# Altium PCB v1_long.PcbDoc (part 4 of 4)
Units mm, origin at the board's own origin, x right, y up, seen from the top; angles counter-clockwise.
Board outline 116.27 x 185.5 mm, 2 copper layers (Top Layer, Bottom Layer); 294 components, 195 nets, 982 pads, 413 vias.
Unrouted connection lines stored in the file: 3.
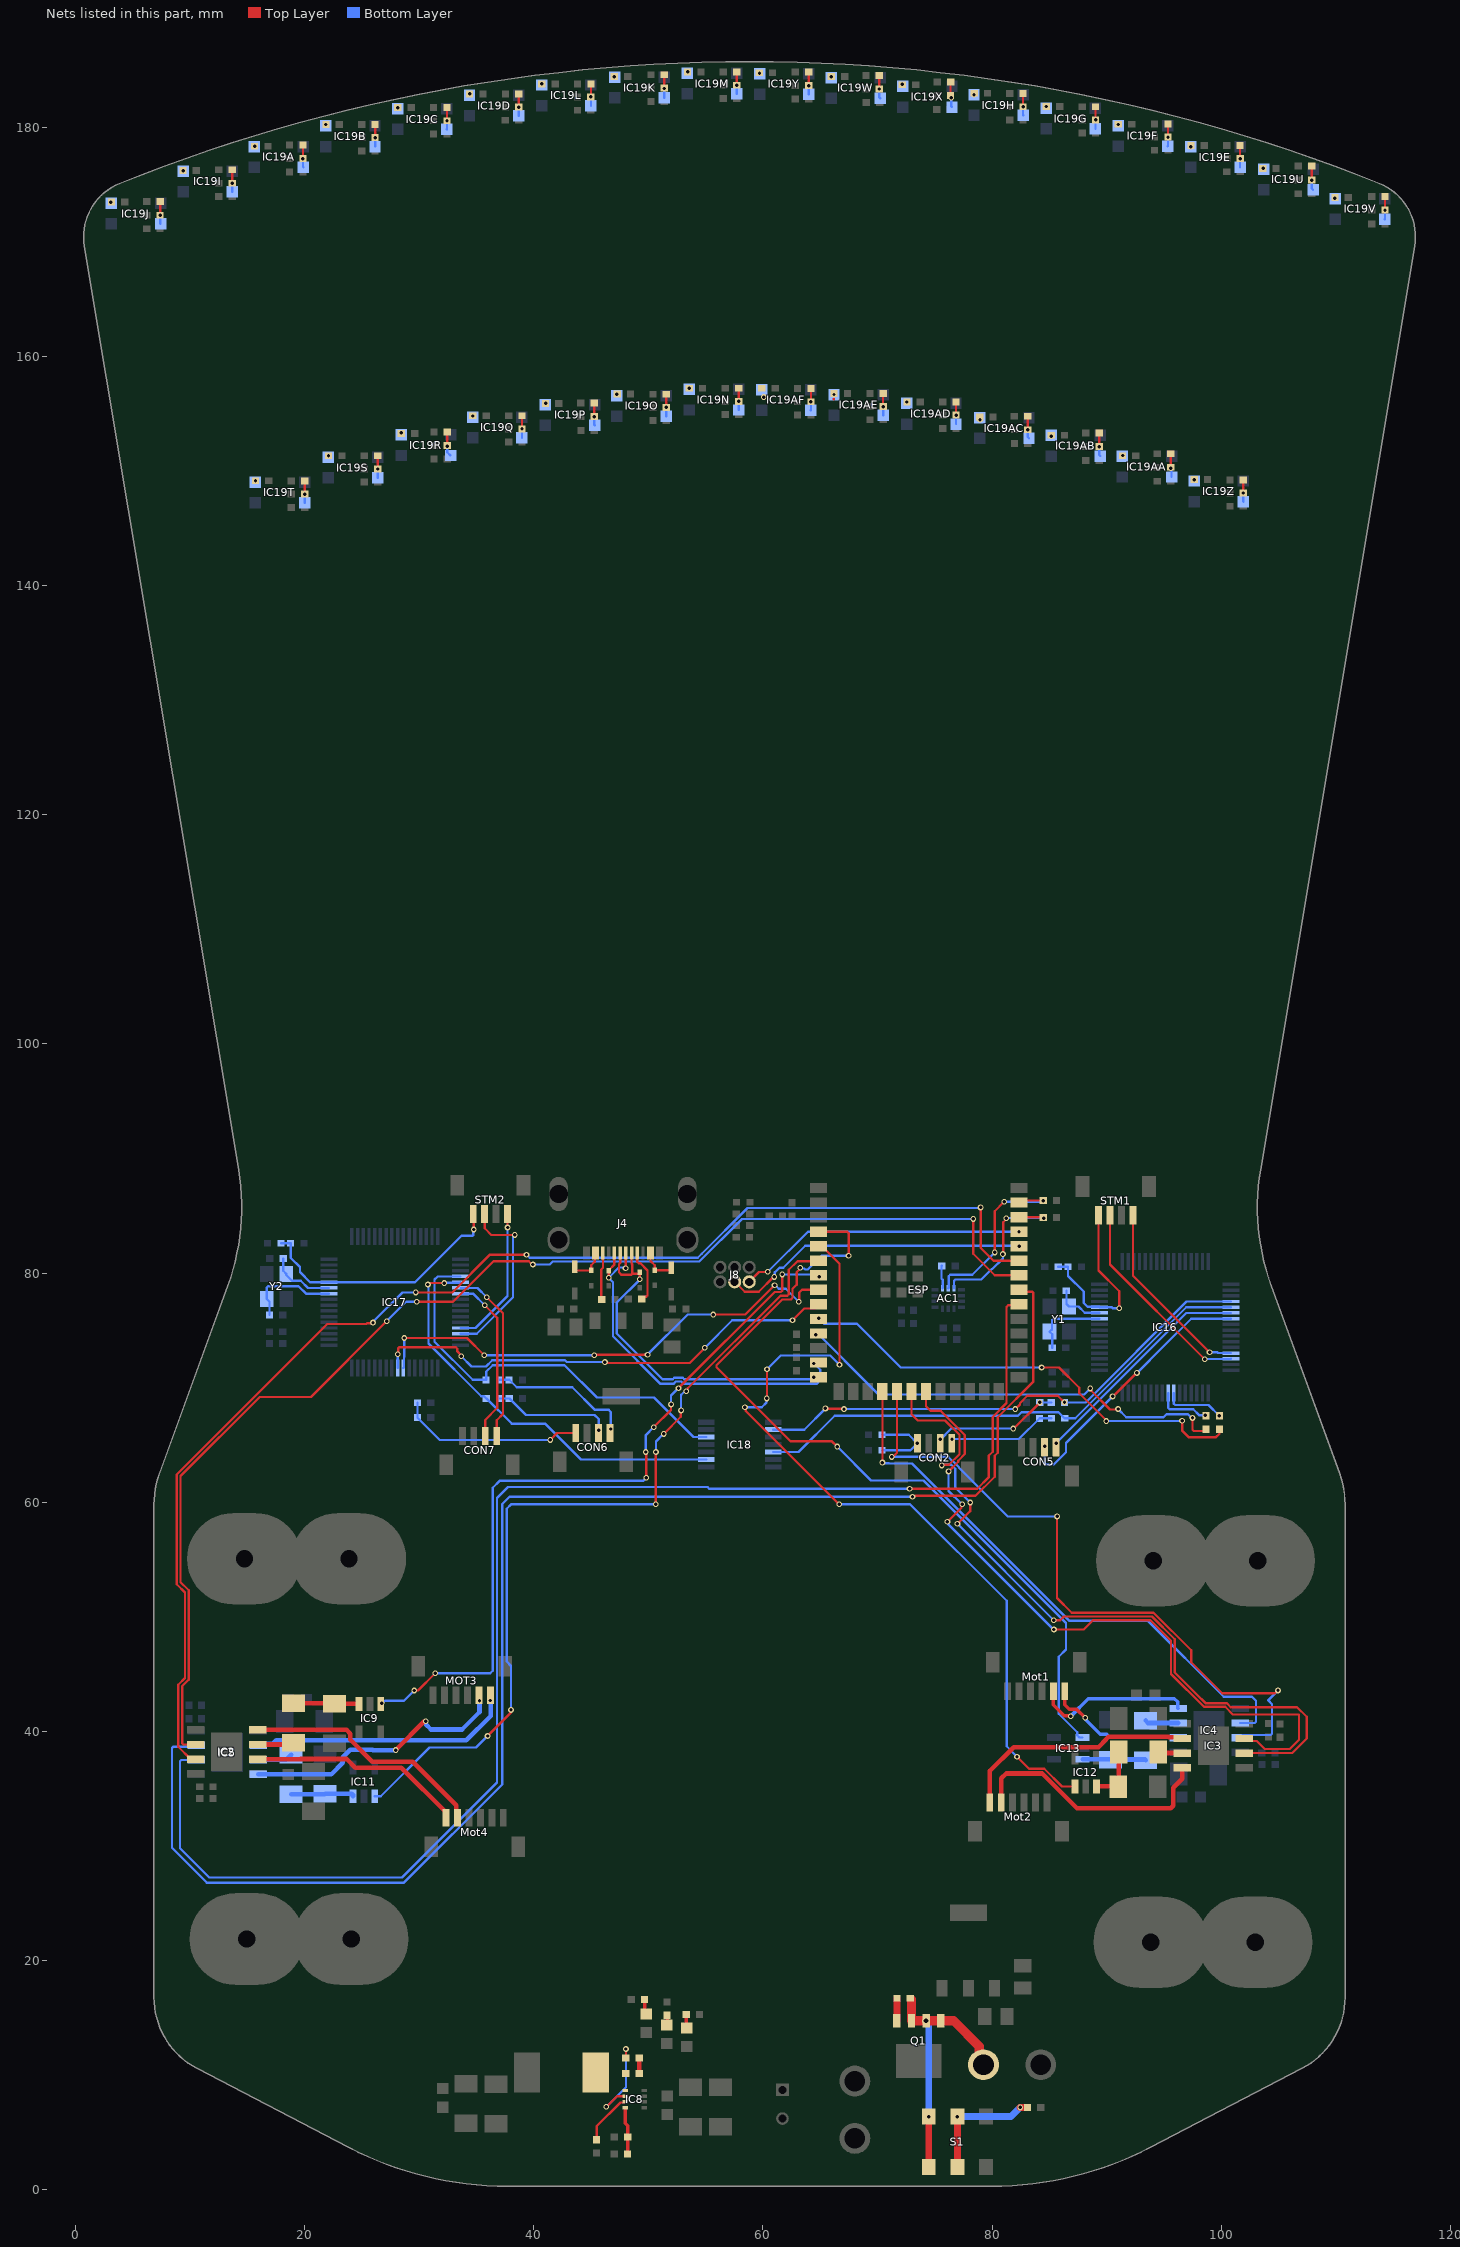
[diagram p4: the nets of this part, all layers, seen from the top]

## Via types
v1: diameter 0.5, hole 0.3, Top Layer to Bottom Layer, tented both sides, 349 vias
v2: diameter 0.4, hole 0.25, Top Layer to Bottom Layer, tented both sides, 63 vias
v3: diameter 0.7, hole 0.4, Top Layer to Bottom Layer, tented both sides, 1 vias

## Nets (pads, with @x,y where several pads share a name; then routed paths per layer and width w, separated by ;. In a path a pad name is that pad's centre, name@x,y a point inside that pad or via, vN(x,y) a via of type N, cw(c..) or ccw(c..) an arc to the next point about the centre after c; other vN are vias at no path point) (continued)
M_CURR_1: ESP.4 IC13.1 | length 72.6
  Top Layer w0.2: v1(63.25,80.455) 63.25,80.374 62.935,80.058 62.935,78.985 62.584,78.634 62.584,77.834 62.441,77.691 61.686,77.691 55.943,71.948 55.943,71.782 62.425,65.3 66.025,65.3 v1(66.475,64.85) ; ESP.4@64.85,83.61 67.358,83.61 67.475,83.493 v1(67.475,81.5)
  Bottom Layer w0.2: v1(63.25,80.455) 63.307,80.398 63.602,80.398 63.7,80.3 63.9,80.3 65.1,81.5 v1(67.475,81.5) ; v1(66.475,64.85) 69.433,61.892 74.008,61.892 86.459,49.441 86.459,47.137 85.825,46.504 85.825,41.525 87.438,39.912 87.438,39.65 87.638,39.45 IC13.1@87.9,39.45
M_CURR_2: ESP.5 IC12.1 | length 73.5
  Top Layer w0.2: v1(58.425,68.275) 58.482,68.218 58.482,67.982 v1(66.647,59.818) ; v1(60.325,69.05) 60.35,69.075 v1(60.35,71.6) ; ESP.5@64.85,82.34 65.15,82.34 66.679,80.811 v1(66.679,71.997) ; v1(82.175,37.775) 83.223,36.727 84.552,36.727 86.104,35.175 IC12.1@87.225,35.175
  Bottom Layer w0.2: v1(58.425,68.275) 59.9,68.275 60.31,68.685 60.31,69.035 v1(60.325,69.05) ; v1(60.35,71.6) 61.55,72.8 65.876,72.8 v1(66.679,71.997) ; v1(66.647,59.818) 72.84,59.818 81.277,51.381 81.277,38.673 v1(82.175,37.775)
M_CURR_3: ESP.6 IC11.1 | length 74.7
  Top Layer w0.2: v1(35.95,39.575) 38,41.625 v1(38,41.85) ; v1(50.625,59.8) 50.638,59.813 50.638,64.363 v1(50.65,64.375) ; v1(51.325,65.95) 52.825,67.45 52.825,67.975 v1(52.85,68) ; v1(53.303,69.679) 53.303,69.76 53.431,69.888 53.431,69.929 61.52,78.018 62.118,78.018 62.257,78.157 62.257,80.282 63.01,81.035 64.815,81.035 ESP.6@64.85,81.07
  Bottom Layer w0.2: IC11.1@26.1,34.325 26.625,34.325 30.875,38.575 34.95,38.575 v1(35.95,39.575) ; v1(38,41.85) 38,45.694 37.619,46.075 37.619,59.419 38,59.8 v1(50.625,59.8) ; v1(50.65,64.375) 50.65,65.3 51.3,65.95 v1(51.325,65.95) ; v1(52.85,68) 52.85,69.359 52.861,69.37 52.865,69.37 53.174,69.679 v1(53.303,69.679)
M_CURR_4: ESP.7 IC9.1 | length 67.1
  Top Layer w0.2: IC9.1@26.625,42.375 26.65,42.375 v1(26.725,42.45) ; v1(29.55,43.55) 29.875,43.55 v1(31.375,45.05) ; v1(49.775,64.375) 49.8,64.35 v1(49.8,62.125) ; v1(50.45,66.525) 51.975,68.05 v1(51.975,68.525) ; v1(52.625,69.95) 61.02,78.345 61.56,78.345 61.677,78.462 v1(61.677,79.875)
  Bottom Layer w0.2: v1(26.725,42.45) 26.792,42.45 26.992,42.65 28.65,42.65 v1(29.55,43.55) ; v1(31.375,45.05) 36.175,45.05 36.4,45.275 36.4,61.25 37,61.85 49.525,61.85 v1(49.8,62.125) ; v1(49.775,64.375) 49.775,65.85 v1(50.45,66.525) ; v1(51.975,68.525) 51.975,69.3 v1(52.625,69.95) ; v1(61.677,79.875) 64.711,79.875 v1(64.922,79.664)
NetAC1_12: AC1.12 R21.1 | length 2
  Bottom Layer w0.2: R21.1@75.616,80.625 75.591,80.6 75.591,79.509 75.7,79.4 75.7,78.7 AC1.12@75.675,78.675
NetC15_1: C15.1 R9.1 | length 1.3
  Top Layer w0.4: C15.1@49.184,10.125 R9.1@49.184,11.45
NetC15_2: C15.2 IC8.5 L1.1
NetC19_1: C19.1 IC8.7 | length 4.5
  Top Layer w0.2: C19.1@45.475,4.352 45.475,5.5 47.55,7.575 47.912,7.575 IC8.7@47.962,7.625
NetCON2_1: CON2.1 R32.1 R33.1 | length 9.8
  Top Layer w0.2: CON2.1@76.475,65.125 76.5,65.15 v1(76.5,65.5)
  Bottom Layer w0.2: v1(76.5,65.5) 82.332,65.5 84.157,67.325 R33.1@85.182,67.325
NetCON2_2: CON2.2 R30.1 R31.1 | length 11.4
  Top Layer w0.2: CON2.2@75.475,65.125 75.475,65.456 v1(75.49,65.47) ; v1(81.85,66.42) 81.895,66.42 v1(84.175,68.7)
  Bottom Layer w0.2: v1(75.49,65.47) 76.439,66.42 v1(81.85,66.42) ; v1(84.175,68.7) R31.1@85.157,68.7
NetCON2_4: CON2.4 R28.1 R29.1 | length 6.7
  Bottom Layer w0.2: R28.1@70.384,64.525 72.875,64.525 v1(73.475,65.125) 72.725,65.875 R29.1@70.384,65.875
NetCON6_1: CON6.1 R38.1 R39.1 | length 12.4
  Bottom Layer w0.2: R39.1@36.993,70.675 R38.1@37.825,70.675 37.842,70.675 38.492,70.025 43.35,70.025 45.325,68.05 46.525,68.05 46.703,67.872 v1(46.703,66.382)
NetCON6_2: CON6.2 R36.1 R37.1 | length 10.4
  Bottom Layer w0.2: R37.1@37.009,69.05 R36.1@37.841,69.05 37.858,69.05 39.308,67.6 45.3,67.6 45.65,67.25 v1(45.65,66.275)
NetCON6_4: CON6.4 R34.1 R35.1 | length 16.2
  Top Layer w0.2: v1(41.425,65.425) 42.025,66.025 CON6.4@43.65,66.025
  Bottom Layer w0.2: R34.1@29.832,68.675 29.832,67.375 R35.1@29.835,67.372 31.782,65.425 v1(41.425,65.425)
NetD1_2: D1.2 R12.2 | length 1.3
  Top Layer w0.3: R12.2@49.659,16.575 49.659,15.454 D1.2@49.8,15.313
NetD2_2: D2.2 R13.2 | length 1.2
  Top Layer w0.3: R13.2@53.291,15.275 53.291,14.122 D2.2@53.325,14.088
NetD3_2: D3.2 ESP.13 J4.A6 J4.B6 | length 33.1
  Top Layer w0.2: v1(46.525,79.595) D3.2@46.525,80.195 46.525,80.235 47.025,80.735 J4.B6@47.025,81.75 ; v1(48,80.418) 48.012,80.431 48.012,81.3 48.025,81.312 J4.A6@48.025,81.75 ; v1(64.45,72.1) 64.53,72.18 ESP.13@64.85,72.18
  Bottom Layer w0.2: v1(48,80.418) 47.943,80.475 47.495,80.475 47.45,80.52 v1(46.525,79.595) 46.525,79.577 46.905,79.197 46.905,74.47 51.055,70.32 52.175,70.32 52.385,70.53 52.865,70.53 53.075,70.32 64.665,70.32 65.005,70.66 65.005,71.545 v1(64.45,72.1)
NetD4_2: D4.2 ESP.14 J4.A7 J4.B7 | length 31.2
  Top Layer w0.2: J4.A7@47.525,81.75 47.525,80.87 47.42,80.765 47.42,80.062 47.644,79.838 48.473,79.838 48.58,79.945 ; J4.B7@48.525,81.75 48.525,80.82 48.58,80.765 48.58,79.945 ; v1(49.25,79.445) 49.25,79.945 D4.2@49.25,80.045 49.15,79.945 48.58,79.945 ; v1(64.425,70.9) 64.435,70.91 ESP.14@64.85,70.91
  Bottom Layer w0.2: v1(49.25,79.445) 47.232,77.427 47.232,74.718 51.225,70.725 52.117,70.725 52.249,70.857 53.001,70.857 53.133,70.725 64.169,70.725 64.344,70.9 v1(64.425,70.9)
NetD5_2: D5.2 IC7.2 J4.A9 | length 3.3
  Top Layer w0.2: IC7.2@43.45,80.287 43.517,80.22 D5.2@45,80.22 45,80.675 45.3,80.975 45.3,81.675 J4.A9@45.375,81.75
NetD6_2: D6.2 IC6.2 J4.A4 | length 3.1
  Top Layer w0.2: J4.A4@50.175,81.75 50.175,81.05 50.55,80.675 D6.2@50.55,80.235 51.948,80.235 IC6.2@52,80.287
NetD7_2: D7.2 R17.2 | length 0.9
  Top Layer w0.3: D7.2@51.6,14.338 51.625,14.363 R17.2@51.625,15.191
NetIC1_8: ESP.8 IC17.55 | length 43.4
  Top Layer w0.2: v1(28.675,74.325) 34.153,74.325 v1(35.664,72.814) ; v1(45.26,72.828) 45.307,72.875 v1(49.925,72.875) ; v1(55.655,76.375) 58.46,76.375 v1(61.01,78.925) ; v1(63.125,77.5) 63.175,77.55 63.175,78.3 63.405,78.53 ESP.8@64.85,78.53
  Bottom Layer w0.2: IC17.55@28.6,71.712 28.65,71.762 28.65,72.63 28.68,72.66 28.68,74.32 v1(28.675,74.325) ; v1(35.664,72.814) 45.246,72.814 v1(45.26,72.828) ; v1(49.925,72.875) 53.425,76.375 v1(55.655,76.375) ; v1(61.01,78.925) 61.091,78.925 61.381,78.635 61.99,78.635 v1(63.125,77.5)
NetIC1_9: ESP.9 IC17.56 | length 41.8
  Top Layer w0.2: v1(28.1,72.9) 28.157,72.957 28.157,73.44 28.242,73.525 33.175,73.525 33.316,73.384 33.316,73.14 33.65,72.806 v1(33.65,72.725) ; v1(46.2,72.225) 46.257,72.168 46.45,72.168 46.467,72.15 53.6,72.15 v1(54.925,73.475) ; v1(62.575,75.875) 63.61,76.91 64.5,76.91 ESP.9@64.85,77.26
  Bottom Layer w0.2: IC17.56@28.1,71.712 v1(28.1,72.9) ; v1(33.65,72.725) 34.546,71.829 35.816,71.829 36.363,72.375 42.712,72.375 42.862,72.225 v1(46.2,72.225) ; v1(54.925,73.475) 57.325,75.875 v1(62.575,75.875)
NetIC1_10: ESP.10 R19.1 | length 40.6
  Top Layer w0.2: v1(84.325,71.75) 85.851,71.75 87.621,69.98 87.621,69.5 89.975,67.146 v1(89.975,67.075) ; v1(96.593,67.1) 96.593,66.257 97.2,65.65 99.528,65.65 99.55,65.672 cw(c100.188,65.037) 99.552,65.675 99.85,65.972 R19.1@99.85,66.366
  Bottom Layer w0.2: v1(64.872,76.033) 65.33,75.575 68.2,75.575 72.025,71.75 v1(84.325,71.75) ; v1(89.975,67.075) 96.568,67.075 v1(96.593,67.1)
NetIC1_11: ESP.11 R43.1 | length 39
  Top Layer w0.2: v1(88.577,69.923) 88.577,69.841 88.65,69.769 88.65,69.725 90.3,68.075 90.95,68.075 v1(91,68.125) ; v1(97.5,67.35) 97.5,66.317 97.617,66.2 98.509,66.2 R43.1@98.675,66.366
  Bottom Layer w0.2: v1(64.6,74.595) 64.638,74.557 64.939,74.557 66.919,72.577 67.259,72.237 70.096,69.4 88.055,69.4 v1(88.577,69.923) ; v1(91,68.125) 91.723,67.402 94.977,67.402 95.255,67.68 97.088,67.68 97.419,67.35 v1(97.5,67.35)
NetIC2_6: IC2.6 Mot4.1 | length 18.8
  Top Layer w0.4: IC2.6@15.887,37.565 19.613,37.565 19.615,37.566 23.643,37.566 24.393,36.816 28.422,36.816 32.325,32.913 Mot4.1@32.325,32.438
NetIC2_7: IC2.7 R16.1 | length 3.2
  Top Layer w0.4: IC2.7@15.887,38.835 18.835,38.835 R16.1@19,39
NetIC2_8: IC2.8 Mot4.2 | length 21.5
  Top Layer w0.4: IC2.8@15.887,40.105 23.644,40.105 23.967,39.782 23.967,39.271 25.895,37.343 29.407,37.343 33.225,33.525 33.225,32.538 Mot4.2@33.325,32.438
NetIC3_6: IC3.6 Mot2.1 | length 20.9
  Top Layer w0.4: Mot2.1@79.8,33.775 79.8,36.525 81.877,38.602 89.29,38.602 89.984,39.296 89.984,39.31 90.175,39.502 95.425,39.502 95.442,39.485 96.488,39.485 IC3.6@96.613,39.36
NetIC3_7: IC3.7 R7.1 | length 2.1
  Top Layer w0.4: R7.1@94.527,38.175 94.612,38.09 IC3.7@96.613,38.09
NetIC3_8: IC3.8 Mot2.2 | length 22.3
  Top Layer w0.4: Mot2.2@80.8,33.775 80.8,35.875 81.225,36.3 84.375,36.3 87.415,33.26 95.591,33.26 95.825,33.495 95.825,35.05 96.613,35.838 IC3.8@96.613,36.82
NetIC4_6: IC4.6 Mot1.1 | length 12.3
  Top Layer w0.3: Mot1.1@86.35,43.487 86.35,42.3 86.725,41.925 87.375,41.925 v1(88.125,41.175)
  Bottom Layer w0.3: v1(88.125,41.175) 88.125,41.121 88.225,41.021 88.225,40.948 89.448,39.725 90.01,39.725 90.278,39.458 96.221,39.458 IC4.6@96.238,39.44
NetIC4_7: IC4.7 R8.1 | length 2.9
  Bottom Layer w0.4: R8.1@93.4,40.927 93.617,40.71 IC4.7@96.238,40.71
NetIC4_8: IC4.8 Mot1.2 | length 13.8
  Top Layer w0.3: Mot1.2@85.35,43.487 85.35,42.3 86.317,41.333 86.837,41.333 v1(86.875,41.295)
  Bottom Layer w0.3: v1(86.875,41.295) 86.937,41.357 86.937,41.363 88.399,42.825 95.925,42.825 96.2,42.55 96.2,42.018 IC4.8@96.238,41.98
NetIC5_6: IC5.6 MOT3.1 | length 22.7
  Bottom Layer w0.4: IC5.6@15.937,38.76 16.062,38.885 17.185,38.885 17.5,39.2 34.1,39.2 36.225,41.325 36.225,41.818 36.214,41.829 36.214,42.656 v1(36.195,42.675)
NetIC5_7: IC5.7 R20.1 | length 3
  Bottom Layer w0.4: IC5.7@15.937,37.49 18.361,37.49 R20.1@18.8,37.929
NetIC5_8: IC5.8 MOT3.2 | length 23.6
  Top Layer w0.4: v1(27.925,38.35) 30.431,40.856 30.526,40.856 v1(30.545,40.875)
  Bottom Layer w0.4: IC5.8@15.937,36.22 22.314,36.22 23.325,37.231 23.325,37.725 23.975,38.375 25.924,38.375 25.949,38.35 v1(27.925,38.35) ; v1(30.545,40.875) 30.565,40.856 30.565,40.599 31.017,40.146 33.721,40.146 35.25,41.675 v1(35.25,42.65)
NetIC8_6: IC8.6 R9.2 | length 8.6
  Top Layer w0.2: v1(46.325,7.2) 47.25,8.125 IC8.6@47.962,8.125 ; R9.2@48.016,11.45 48.035,11.469 v1(48.035,12.251)
  Bottom Layer w0.2: v1(46.325,7.2) 48.035,8.91 v1(48.035,12.251)
NetIC8_8: IC8.8 R10.2 R11.2 | length 4.1
  Top Layer w0.3: IC8.8@47.962,7.125 47.962,5.763 48.184,5.541 R10.2@48.184,4.55 48.18,4.545 48.18,3.08 R11.2@48.175,3.075
NetIC9_3: IC9.3 R16.2 R24.1 | length 5.8
  Top Layer w0.4: R16.2@19,42.454 22.525,42.454 R24.1@22.575,42.404 24.696,42.404 IC9.3@24.725,42.375
NetIC11_3: IC11.3 R20.2 R25.1 | length 5.6
  Bottom Layer w0.4: R20.2@18.8,34.475 21.727,34.475 R25.1@21.775,34.523 24.1,34.523 24.2,34.423 IC11.3@24.2,34.325
NetIC12_3: IC12.3 R7.2 R22.1 | length 5
  Top Layer w0.4: IC12.3@89.125,35.175 90.998,35.175 R22.1@91.023,35.15 91.073,35.2 R7.2@91.073,38.175
NetIC13_3: IC13.3 R8.2 R23.1 | length 5.5
  Bottom Layer w0.4: IC13.3@87.9,37.55 90.323,37.55 R23.1@90.35,37.523 93.35,37.523 R8.2@93.4,37.473
NetIC16_55: IC16.55 R19.2 | length 5.3
  Top Layer w0.2: v1(99.84,67.53) 99.846,67.53 R19.2@99.85,67.534
  Bottom Layer w0.2: IC16.55@95.875,69.524 95.875,68.592 95.992,68.475 98.895,68.475 v1(99.84,67.53)
NetIC16_56: IC16.56 R43.2 | length 4.9
  Top Layer w0.2: v1(98.628,67.565) 98.644,67.565 R43.2@98.675,67.534
  Bottom Layer w0.2: IC16.56@95.375,69.524 95.375,68.217 95.492,68.1 97.57,68.1 98.078,67.592 98.601,67.592 v1(98.628,67.565)
NetIC19A_1: IC19A.1 R41A.2 | length 0
  Top Layer w0.2: R41A.2@15.607,178.375 15.622,178.375 v1(15.633,178.364)
NetIC19A_3: IC19A.3 R40A.1 R42A.2 | length 1.9
  Top Layer w0.2: v1(19.834,177.3) R40A.1@19.834,178.475
  Bottom Layer w0.2: v1(19.834,177.3) 19.834,176.591 IC19A.3@19.875,176.55
NetIC19AA_1: IC19AA.1 R41AA.2 | length 0
  Top Layer w0.2: R41AA.2@91.382,151.35 91.391,151.35 v1(91.416,151.375)
NetIC19AA_3: IC19AA.3 R40AA.1 R42AA.2 | length 2
  Top Layer w0.2: R42AA.2@95.6,150.35 R40AA.1@95.6,151.525
  Bottom Layer w0.2: v1(95.598,150.281) 95.675,150.204 IC19AA.3@95.675,149.5
NetIC19AB_1: IC19AB.1 R41AB.2 | length 0
  Top Layer w0.2: v1(85.175,153.075) 85.182,153.075 R41AB.2@85.207,153.1
NetIC19AB_3: IC19AB.3 R40AB.1 R42AB.2 | length 2.1
  Top Layer w0.2: R42AB.2@89.359,152.15 R40AB.1@89.359,153.35
  Bottom Layer w0.2: v1(89.359,152.145) 89.359,151.416 IC19AB.3@89.45,151.325
NetIC19AC_1: IC19AC.1 R41AC.2 | length 0.1
  Top Layer w0.2: R41AC.2@78.941,154.55 78.941,154.508 v1(78.948,154.5)
NetIC19AC_3: IC19AC.3 R40AC.1 R42AC.2 | length 2
  Top Layer w0.2: v1(83.109,153.634) R40AC.1@83.109,154.8
  Bottom Layer w0.2: v1(83.109,153.634) 83.109,152.989 IC19AC.3@83.223,152.875
NetIC19AD_1: IC19AD.1 R41AD.2
  other v1: 72.566,156.05
NetIC19AD_3: IC19AD.3 R40AD.1 R42AD.2 | length 1.9
  Top Layer w0.2: v1(76.859,154.9) R40AD.1@76.859,156.05
  Bottom Layer w0.2: IC19AD.3@76.85,154.125 76.859,154.134 v1(76.859,154.9)
NetIC19AE_1: IC19AE.1 R41AE.2 | length 0.1
  Top Layer w0.2: 66.175,156.275 66.182,156.282 66.182,156.35
  other v1: 66.2,156.7
NetIC19AE_3: IC19AE.3 R40AE.1 R42AE.2 | length 1.9
  Top Layer w0.2: v1(70.484,155.641) 70.484,156.775 R40AE.1@70.509,156.8
  Bottom Layer w0.2: v1(70.484,155.641) 70.5,155.626 IC19AE.3@70.5,154.9
NetIC19AF_1: IC19AF.1 R41AF.2 | length 0.1
  Top Layer w0.2: v1(60.075,156.475) 60.075,156.584 v1@60.091,156.6
NetIC19AF_3: IC19AF.3 R40AF.1 R42AF.2 | length 1.9
  Top Layer w0.2: v1(64.184,156.075) R40AF.1@64.184,157.225
  Bottom Layer w0.2: IC19AF.3@64.175,155.325 64.184,155.334 v1(64.184,156.075)
NetIC19B_1: IC19B.1 R41B.2
  other v1: 21.841,180.275
NetIC19B_3: IC19B.3 R40B.1 R42B.2 | length 1.9
  Top Layer w0.2: v1(26.134,179.125) R40B.1@26.134,180.275
  Bottom Layer w0.2: IC19B.3@26.125,178.35 26.134,178.359 v1(26.134,179.125)
NetIC19C_1: IC19C.1 R41C.2 | length 0.1
  Bottom Layer w0.2: IC19C.1@28.1,181.65 28.116,181.666 v1(28.116,181.75)
NetIC19C_3: IC19C.3 R40C.1 R42C.2 | length 1.9
  Top Layer w0.2: v1(32.409,180.6) R40C.1@32.409,181.75
  Bottom Layer w0.2: IC19C.3@32.4,179.85 32.409,179.859 v1(32.409,180.6)
NetIC19D_1: IC19D.1 R41D.2
  other v1: 34.382,182.95
NetIC19D_3: IC19D.3 R40D.1 R42D.2 | length 1.9
  Top Layer w0.2: v1(38.684,181.8) R40D.1@38.684,182.95
  Bottom Layer w0.2: IC19D.3@38.675,181.025 38.684,181.034 v1(38.684,181.8)
NetIC19E_1: IC19E.1 R41E.2 | length 0.1
  Top Layer w0.2: v1(97.35,178.325) 97.35,178.434 R41E.2@97.366,178.45
NetIC19E_3: IC19E.3 R40E.1 R42E.2 | length 1.9
  Top Layer w0.2: R42E.2@101.65,177.309 R40E.1@101.65,178.45
  Bottom Layer w0.2: IC19E.3@101.65,176.525 101.65,177.269 v1(101.68,177.298)
NetIC19F_1: IC19F.1 R41F.2 | length 0
  Top Layer w0.2: R41F.2@91.016,180.3 91.016,180.284 v1(91.025,180.275)
NetIC19F_3: IC19F.3 R40F.1 R42F.2 | length 2
  Top Layer w0.2: v1(95.359,179.175) R40F.1@95.359,180.325
  Bottom Layer w0.2: IC19F.3@95.325,178.375 95.359,178.409 v1(95.359,179.175)
NetIC19G_1: IC19G.1 R41G.2
  other v1: 84.741,181.85
NetIC19G_3: IC19G.3 R40G.1 R42G.2 | length 1.9
  Top Layer w0.2: v1(89.034,180.675) R40G.1@89.034,181.825
  Bottom Layer w0.2: IC19G.3@89.025,179.9 89.034,179.909 v1(89.034,180.675)
NetIC19H_1: IC19H.1 R41H.2 | length 0.1
  Top Layer w0.2: v1(78.423,182.875) 78.441,182.892 R41H.2@78.441,183
NetIC19H_3: IC19H.3 R40H.1 R42H.2 | length 1.9
  Top Layer w0.2: v1(82.709,181.825) R40H.1@82.709,182.975
  Bottom Layer w0.2: v1(82.709,181.825) 82.709,181.089 IC19H.3@82.723,181.075
NetIC19I_1: IC19I.1 R41I.2 | length 0
  Top Layer w0.2: R41I.2@9.357,176.275 9.379,176.252 v1(9.379,176.243)
NetIC19I_3: IC19I.3 R40I.1 R42I.2 | length 1.9
  Top Layer w0.2: v1(13.65,175.15) R40I.1@13.65,176.325
  Bottom Layer w0.2: v1(13.65,175.15) 13.65,174.416 IC19I.3@13.666,174.4
NetIC19J_1: IC19J.1 R41J.2 | length 0.1
  Top Layer w0.2: v1(3.05,173.478) 3.094,173.478 R41J.2@3.116,173.5
NetIC19J_3: IC19J.3 R40J.1 R42J.2 | length 2
  Top Layer w0.2: v1(7.368,172.359) R40J.1@7.368,173.55
  Bottom Layer w0.2: v1(7.368,172.359) 7.368,171.632 IC19J.3@7.4,171.6
NetIC19K_1: IC19K.1 R41K.2 | length 0
  Top Layer w0.2: R41K.2@47.016,184.475 47.016,184.459 v1(47.025,184.45)
NetIC19K_3: IC19K.3 R40K.1 R42K.2 | length 2
  Top Layer w0.2: R42K.2@51.384,183.45 R40K.1@51.384,184.625
  Bottom Layer w0.2: IC19K.3@51.375,182.6 51.384,182.609 v1(51.384,183.42)
NetIC19L_1: IC19L.1 R41L.2
  other v1: 40.691,183.825
NetIC19L_3: IC19L.3 R40L.1 R42L.2 | length 1.9
  Top Layer w0.2: v1(44.975,182.682) R40L.1@44.975,183.825
  Bottom Layer w0.2: IC19L.3@44.975,181.925 v1(44.975,182.682)
NetIC19M_1: IC19M.1 R41M.2
  other v1: 53.416,184.875
NetIC19M_3: IC19M.3 R40M.1 R42M.2 | length 1.9
  Top Layer w0.2: v1(57.709,183.7) R40M.1@57.709,184.85
  Bottom Layer w0.2: IC19M.3@57.7,182.95 57.709,182.959 v1(57.709,183.7)
NetIC19N_1: IC19N.1 R41N.2
  other v1: 53.557,157.25
NetIC19N_3: IC19N.3 R40N.1 R42N.2 | length 1.9
  Top Layer w0.2: v1(57.875,156.1) R40N.1@57.875,157.25
  Bottom Layer w0.2: IC19N.3@57.866,155.35 57.875,155.359 v1(57.875,156.1)
NetIC19O_1: IC19O.1 R41O.2 | length 0
  Top Layer w0.2: v1(47.237,156.733) 47.249,156.733 R41O.2@47.266,156.75
NetIC19O_3: IC19O.3 R40O.1 R42O.2 | length 1.9
  Top Layer w0.2: v1(51.559,155.575) R40O.1@51.559,156.725
  Bottom Layer w0.2: IC19O.3@51.55,154.8 51.559,154.809 v1(51.559,155.575)
NetIC19P_1: IC19P.1 R41P.2 | length 0
  Top Layer w0.2: R41P.2@41.007,155.925 v1(41.025,155.925)
NetIC19P_3: IC19P.3 R40P.1 R42P.2 | length 1.9
  Top Layer w0.2: v1(45.259,154.775) R40P.1@45.259,155.95
  Bottom Layer w0.2: v1(45.259,154.775) 45.259,154.066 IC19P.3@45.3,154.025
NetIC19Q_1: IC19Q.1 R41Q.2 | length 0
  Top Layer w0.2: v1(34.65,154.825) 34.666,154.841 R41Q.2@34.666,154.85
NetIC19Q_3: IC19Q.3 R40Q.1 R42Q.2 | length 1.9
  Top Layer w0.2: v1(38.959,153.7) R40Q.1@38.959,154.85
  Bottom Layer w0.2: IC19Q.3@38.95,152.925 38.959,152.934 v1(38.959,153.7)
NetIC19R_1: IC19R.1 R41R.2 | length 0.1
  Top Layer w0.2: R41R.2@28.416,153.3 28.416,153.341 v1(28.425,153.35)
NetIC19R_3: IC19R.3 R40R.1 R42R.2 | length 2.1
  Top Layer w0.2: R42R.2@32.434,152.25 R40R.1@32.434,153.425
  Bottom Layer w0.2: v1(32.434,152.195) 32.434,151.666 IC19R.3@32.725,151.375
NetIC19S_1: IC19S.1 R41S.2
  other v1: 22.066,151.35
NetIC19S_3: IC19S.3 R40S.1 R42S.2 | length 1.9
  Top Layer w0.2: v1(26.359,150.2) R40S.1@26.359,151.35
  Bottom Layer w0.2: IC19S.3@26.35,149.425 26.359,149.434 v1(26.359,150.2)
NetIC19T_1: IC19T.1 R41T.2
  other v1: 15.691,149.175
NetIC19T_3: IC19T.3 R40T.1 R42T.2 | length 1.9
  Top Layer w0.2: v1(19.984,148) R40T.1@19.984,149.15
  Bottom Layer w0.2: IC19T.3@19.975,147.25 19.984,147.259 v1(19.984,148)
NetIC19U_1: IC19U.1 R41U.2 | length 0
  Top Layer w0.2: R41U.2@103.632,176.425 103.655,176.448 v1(103.664,176.448)
NetIC19U_3: IC19U.3 R40U.1 R42U.2 | length 2.1
  Top Layer w0.2: v1(107.909,175.395) R42U.2@107.909,175.425 R40U.1@107.909,176.65
  Bottom Layer w0.2: v1(107.909,175.395) 107.909,174.691 IC19U.3@108.025,174.575
NetIC19V_1: IC19V.1 R41V.2 | length 0.1
  Top Layer w0.2: v1(109.903,173.847) 109.941,173.885 R41V.2@109.941,173.9
NetIC19V_3: IC19V.3 R40V.1 R42V.2 | length 2
  Top Layer w0.2: v1(114.309,172.8) R40V.1@114.309,174
  Bottom Layer w0.2: IC19V.3@114.275,172 114.309,172.034 v1(114.309,172.8)
NetIC19W_1: IC19W.1 R41W.2 | length 0
  Top Layer w0.2: v1(65.949,184.438) 65.966,184.455 R41W.2@65.966,184.475
NetIC19W_3: IC19W.3 R40W.1 R42W.2 | length 2
  Top Layer w0.2: v1(70.159,183.375) R40W.1@70.159,184.55
  Bottom Layer w0.2: v1(70.159,183.375) 70.159,182.666 IC19W.3@70.25,182.575
NetIC19X_1: IC19X.1 R41X.2 | length 0
  Top Layer w0.2: v1(72.15,183.775) 72.15,183.766 R41X.2@72.166,183.75
NetIC19X_3: IC19X.3 R40X.1 R42X.2 | length 2.2
  Top Layer w0.2: R40X.1@76.384,183.975 76.375,183.966 R42X.2@76.375,182.8 76.425,182.75 v1(76.425,182.62)
  Bottom Layer w0.2: v1(76.425,182.62) 76.425,181.875 IC19X.3@76.5,181.8
NetIC19Y_1: IC19Y.1 R41Y.2 | length 0.1
  Top Layer w0.2: R41Y.2@59.666,184.8 59.694,184.771 v1(59.694,184.748)
NetIC19Y_3: IC19Y.3 R40Y.1 R42Y.2 | length 1.9
  Top Layer w0.2: v1(63.984,183.675) R40Y.1@63.984,184.85
  Bottom Layer w0.2: v1(63.984,183.675) 63.984,182.941 IC19Y.3@64,182.925
NetIC19Z_1: IC19Z.1 R41Z.2
  other v1: 97.641,149.275
NetIC19Z_3: IC19Z.3 R40Z.1 R42Z.2 | length 1.9
  Top Layer w0.2: v1(101.934,148.1) R40Z.1@101.934,149.25
  Bottom Layer w0.2: v1(101.934,148.1) 101.934,147.366 IC19Z.3@101.95,147.35
NetJ4_A5: J4.A5 R6.2 | length 4.8
  Top Layer w0.2: J4.A5@49.025,81.75 49.025,80.967 49.142,80.85 49.3,80.85 49.925,80.225 49.925,78.042 49.808,77.925 49.609,77.925 R6.2@49.409,77.725
NetJ4_B5: J4.B5 R18.2 | length 3.9
  Top Layer w0.2: R18.2@45.875,77.959 45.875,80.3 46.025,80.45 J4.B5@46.025,81.75
NetJ5_2: "DC IN.2" Q1.1 Q1.2 Q1.3 R1.2 S1.1 S1.4 | length 23.5
  Top Layer w0.4: R1.2@72.859,16.675 72.865,16.675 R1.2@72.965,16.575
  Top Layer w0.6: S1.1@74.475,1.95 v1(74.475,6.35)
  Top Layer w0.8: R1.2@72.965,16.575 Q1.3@72.965,14.71 v3(74.235,14.71) 76.64,14.71 78.886,12.464 78.886,11.239 79.25,10.875
  Bottom Layer w0.4: v3@74.235,14.682 v3(74.235,14.71)
  Bottom Layer w0.6: v3@74.235,14.682 74.475,14.442 v1(74.475,6.35)
NetQ1_4: Q1.4 R1.1 | length 2
  Top Layer w0.4: R1.1@71.691,16.675 R1.1@71.693,16.673 ; Q1.4@71.693,14.712 Q1.4@71.695,14.71
  Top Layer w0.6: Q1.4@71.693,14.712 R1.1@71.693,16.673
NetR3_2: R3.2 S1.2 S1.5 | length 10.8
  Top Layer w0.6: S1.2@76.975,1.95 v1(76.975,6.35) ; v1(82.45,7.15) R3.2@83.091,7.15
  Bottom Layer w0.6: v1(76.975,6.35) 81.65,6.35 v1(82.45,7.15)
OSC_IN1: C49.1 IC16.10 Y1.1 | length 6.8
  Bottom Layer w0.2: C49.1@85.257,73.475 85.257,74.643 Y1.1@85.025,74.875 85.225,75.075 85.225,75.895 85.342,76.012 IC16.10@89.387,76.012
OSC_IN2: C51.1 IC17.10 Y2.1 | length 8.2
  Bottom Layer w0.2: C51.1@16.907,76.35 16.907,77.493 Y2.1@16.675,77.725 16.675,78.733 16.792,78.85 19.45,78.85 20.1,78.2 IC17.10@22.112,78.2
OSC_OUT1: C50.1 IC16.11 Y1.3 | length 4.4
  Bottom Layer w0.2: C50.1@86.502,78.45 86.502,77.298 Y1.3@86.725,77.075 87.55,77.075 88.1,76.525 89.374,76.525 IC16.11@89.387,76.512
OSC_OUT2: C52.1 IC17.11 Y2.3 | length 5.8
  Bottom Layer w0.2: C52.1@18.109,81.275 18.109,80.191 Y2.3@18.375,79.925 18.375,79.825 18.875,79.325 19.65,79.325 20.275,78.7 IC17.11@22.112,78.7
PWM1: ESP.18 IC4.2 | length 50.7
  Top Layer w0.2: v1(70.425,63.45) ESP.18@70.425,69.66
  Bottom Layer w0.2: v1(70.425,63.45) 70.482,63.393 70.975,63.393 71.002,63.365 73.01,63.365 86.725,49.65 93.575,49.65 100.225,43 102.7,43 103.05,42.65 103.05,40.827 102.933,40.71 IC4.2@101.662,40.71
PWM1_STM1: IC16.36 IC18.2 R31.2 | length 45.2
  Top Layer w0.2: v1(65.45,68.175) 65.477,68.148 67.048,68.148 v1(67.075,68.12) ; v1(82.025,68.12) 82.432,68.527 82.432,68.632 83.08,69.28 85.745,69.28 v1(86.325,68.7)
  Bottom Layer w0.2: IC18.2@60.9,66.325 63.6,66.325 v1(65.45,68.175) ; v1(67.075,68.12) v1(82.025,68.12) ; R31.2@86.307,68.7 v1(86.325,68.7) 88.175,68.7 96.987,77.512 IC16.36@100.863,77.512
PWM1_STM2: IC17.36 IC18.12 R39.2 | length 36.4
  Bottom Layer w0.2: IC17.36@33.588,79.7 31.6,79.7 31.325,79.425 31.325,74 34.65,70.675 R39.2@35.825,70.675 35.825,71.375 36.4,71.95 42.675,71.95 45.5,69.125 50.475,69.125 53.925,65.675 IC18.12@55.05,65.675
PWM2: ESP.19 IC4.3 | length 60.3
  Top Layer w0.2: v1(71.243,63.945) 71.324,63.945 71.695,64.316 ESP.19@71.695,69.66 ; v1(85.675,58.75) 85.675,51.625 86.959,50.341 94.101,50.341 97.384,47.059 97.384,46.015 100.096,43.302 104.71,43.302 v1(104.963,43.555)
  Bottom Layer w0.2: v1(71.243,63.945) 71.248,63.95 76.163,63.95 76.53,63.582 76.576,63.582 77.107,63.051 77.107,63.006 81.362,58.75 v1(85.675,58.75) ; IC4.3@101.662,39.44 101.887,39.665 104.34,39.665 104.45,39.775 104.45,42.35 104.125,42.675 104.125,42.717 v1(104.963,43.555)
PWM2_STM1: IC16.37 IC18.5 R33.2 | length 45.6
  Bottom Layer w0.2: IC18.5@60.9,64.375 63.1,64.375 66.265,67.54 82.265,67.54 82.577,67.852 85.806,67.852 86.332,67.325 87.262,67.325 96.949,77.012 IC16.37@100.863,77.012
PWM2_STM2: IC17.37 IC18.9 R37.2 | length 36.5
  Top Layer w0.2: v1(30.745,78.997) 30.826,78.997 30.96,79.131 32.164,79.131 v1(32.175,79.12)
  Bottom Layer w0.2: v1(30.745,78.997) 30.802,78.94 30.802,73.848 35.4,69.25 35.641,69.25 R37.2@35.841,69.05 35.858,69.05 38.058,66.85 40.975,66.85 44.1,63.725 IC18.9@55.05,63.725 ; v1(32.175,79.12) 32.215,79.16 33.548,79.16 IC17.37@33.588,79.2
PWM3: ESP.32 IC5.2 | length 126.6
  Top Layer w0.2: v1(72.796,61.154) 78.704,61.154 79.7,62.15 79.7,64.05 80.05,64.4 80.05,67.428 81.262,68.64 81.262,77.027 81.417,77.182 82.272,77.182 ESP.32@82.35,77.26
  Bottom Layer w0.2: IC5.2@10.513,37.49 9.21,37.49 9.093,37.373 9.093,29.782 11.65,27.225 28.477,27.225 36.775,35.523 36.775,60.35 37.737,61.312 55.147,61.312 55.304,61.154 v1(72.796,61.154)
PWM3_STM1: CON5.2 IC16.39 | length 23.5
  Top Layer w0.2: v1(90.525,69.225) 90.562,69.225 92.612,71.275 v1(92.65,71.275)
  Bottom Layer w0.2: v1(84.583,64.878) 84.583,63.417 84.701,63.3 85.397,63.3 86.45,64.353 86.45,65.15 v1(90.525,69.225) ; v1(92.65,71.275) 94.995,73.62 97.387,76.012 IC16.39@100.863,76.012
PWM3_STM2: CON7.2 IC17.39 | length 14.8
  Top Layer w0.2: v1(35.702,77.187) 36.805,76.083 36.805,68.23 35.75,67.175 CON7.2@35.75,65.775
  Bottom Layer w0.2: IC17.39@33.588,78.2 34.688,78.2 v1(35.702,77.187)
PWM4: ESP.33 IC5.3 | length 131.9
  Top Layer w0.2: v1(73.054,60.472) 73.111,60.529 73.306,60.529 73.321,60.544 78.556,60.544 80.225,62.213 80.225,64.045 80.498,64.317 80.498,67.413 83.608,70.523 83.608,78.258 83.491,78.375 82.505,78.375 ESP.33@82.35,78.53
  Bottom Layer w0.2: IC5.3@10.513,38.76 10.403,38.65 8.517,38.65 8.4,38.533 8.4,29.813 11.438,26.775 28.65,26.775 37.225,35.35 37.225,59.837 37.859,60.472 v1(73.054,60.472)
PWM4_STM1: CON5.1 IC16.38 | length 20
  Bottom Layer w0.2: v1(85.6,65.15) 96.962,76.512 IC16.38@100.863,76.512
PWM4_STM2: CON7.1 IC17.38 | length 15.6
  Top Layer w0.2: v1(35.888,77.893) 37.3,76.48 37.3,67.7 36.75,67.15 CON7.1@36.75,65.775
  Bottom Layer w0.2: IC17.38@33.588,78.7 35.08,78.7 v1(35.888,77.893)
PWM5: ESP.34 IC2.2 | length 111.6
  Top Layer w0.2: IC2.2@10.463,38.835 9.4,38.835 9.283,38.952 9.283,43.926 9.857,44.499 9.857,52.293 9.15,53 9.15,62.272 16.056,69.178 20.528,69.178 v1(27.15,75.8) ; v1(29.758,77.488) 32.926,77.488 36.463,81.025 39.554,81.025 39.834,80.745 v1(39.915,80.745) ; v1(78.35,84.725) 78.35,81.675 80.225,79.8 ESP.34@82.35,79.8
  Bottom Layer w0.2: v1(27.15,75.8) 28.838,77.488 v1(29.758,77.488) ; v1(39.915,80.745) 41.384,80.745 41.637,80.998 54.435,80.998 58.162,84.725 v1(78.35,84.725)
PWM6: ESP.35 IC2.3 | length 113.7
  Top Layer w0.2: IC2.3@10.463,37.565 10.025,37.565 8.956,38.634 8.956,44.061 9.53,44.635 9.53,52.116 8.823,52.823 8.823,62.408 21.955,75.54 25.34,75.54 25.418,75.618 25.893,75.618 v1(25.95,75.675) ; v1(29.675,78.305) 32.863,78.305 36.163,81.605 v1(39.35,81.605) ; v1(79,85.725) 79,82.205 80.133,81.072 ESP.35@82.348,81.072
  Bottom Layer w0.2: v1(25.95,75.675) 25.95,75.74 28.515,78.305 v1(29.675,78.305) ; v1(39.35,81.605) 39.63,81.325 54.3,81.325 54.655,81.68 58.65,85.675 78.95,85.675 v1(79,85.725)
PWM7: ESP.20 IC3.2 | length 65.1
  Top Layer w0.2: ESP.20@72.965,69.66 72.965,67.666 73.504,67.127 75.894,67.127 77.15,65.871 77.15,64.183 76.222,63.255 75.655,63.255 v1(75.6,63.2) ; v1(76.974,58.099) 78.086,59.211 78.086,59.951 v1(78.099,59.964) ; v1(85.388,49.685) 85.949,49.685 86.279,50.014 93.966,50.014 95.95,48.03 95.95,45.13 97.835,43.245 98.632,42.448 100.488,42.448 100.841,42.095 106.63,42.095 107.475,41.25 107.475,39.35 106.215,38.09 IC3.2@102.037,38.09
  Bottom Layer w0.2: v1(75.6,63.2) 75.655,63.255 76.44,63.255 76.78,62.915 76.78,61.27 78.086,59.964 v1(78.099,59.964) ; v1(76.974,58.099) v1(85.388,49.685)
PWM8: ESP.21 IC3.3 | length 62.7
  Top Layer w0.2: ESP.21@74.235,69.66 74.235,68.365 74.625,67.975 75.508,67.975 77.625,65.858 77.625,64.196 77.048,63.619 77.048,63.523 v1(76.2,62.675) ; v1(76.1,58.275) 77.328,59.503 77.328,59.753 v1(77.385,59.81) ; v1(85.402,48.877) 88.01,48.877 88.82,49.687 93.83,49.687 95.623,47.895 95.623,44.994 98.496,42.121 100.353,42.121 101.024,41.45 106.8,41.45 106.8,39.25 106,38.45 103.8,38.45 103.115,39.135 102.262,39.135 IC3.3@102.037,39.36
  Bottom Layer w0.2: v1(76.1,58.275) 76.157,58.218 76.157,58.094 85.374,48.877 v1(85.402,48.877) ; v1(76.2,62.675) 76.2,60.975 77.365,59.81 v1(77.385,59.81)
RESET1: C47.1 IC16.12 R26.1 STM1.1 | length 16.7
  Top Layer w0.2: STM1.1@89.3,85.05 89.3,80.217 91.1,78.417 v1(91.1,76.932)
  Bottom Layer w0.2: C47.1@85.775,80.55 R26.1@86.632,80.55 86.632,79.743 88,78.375 88,77.392 88.349,77.043 89.356,77.043 IC16.12@89.387,77.012 89.393,77.018 90.45,77.018 90.536,76.932 v1(91.1,76.932)
RESET2: C48.1 IC17.12 R27.1 STM2.1 | length 22.8
  Top Layer w0.2: STM2.1@34.7,85.15 34.75,85.1 v1(34.75,83.8)
  Bottom Layer w0.2: C48.1@17.909,82.6 R27.1@18.757,82.6 18.758,82.599 18.758,81.342 19.573,80.527 19.573,80.077 20.45,79.2 IC17.12@22.112,79.2 29.625,79.2 33.675,83.25 34.633,83.25 34.693,83.31 34.693,83.743 v1(34.75,83.8)
RXD0: ESP.37 J8.5 | length 25.4
  Top Layer w0.2: J8.5@58.795,79.23 59.662,80.097 60.398,80.097 v1(60.406,80.105)
  Bottom Layer w0.2: v1(60.406,80.105) 60.424,80.105 63.93,83.61 v1(82.35,83.61)
SCL: AC1.13 ESP.39 R15.1 | length 16.3
  Top Layer w0.2: v1(80.225,81.8) 80.225,85.4 80.975,86.15 81,86.15 v1(81.075,86.225) ; ESP.39@82.35,86.15 82.525,86.325 v1(84.466,86.325)
  Bottom Layer w0.2: AC1.13@76.175,78.675 76.225,78.725 76.225,79.725 76.35,79.85 78.275,79.85 v1(80.225,81.8) ; v1(81.075,86.225) 84.199,86.225 84.241,86.268 84.408,86.268 v1(84.466,86.325)
SCLK1: IC16.45 STM1.4 | length 16.6
  Top Layer w0.2: STM1.4@92.3,85.05 92.3,79.764 v1(98.992,73.072)
  Bottom Layer w0.2: v1(98.992,73.072) 99.673,73.072 99.733,73.012 IC16.45@100.863,73.012
SCLK2: IC17.45 STM2.4 | length 12.4
  Top Layer w0.2: v1(37.7,83.975) STM2.4@37.7,85.15
  Bottom Layer w0.2: IC17.45@33.588,75.2 34.908,75.2 37.7,77.992 v1(37.7,83.975)
SDA: AC1.14 ESP.38 R14.1 | length 14.8
  Top Layer w0.2: v1(80.95,81.652) 80.977,81.679 80.977,84.441 81.23,84.694 v1(81.23,84.775) ; ESP.38@82.35,84.88 84.414,84.88 v1(84.497,84.796)
  Bottom Layer w0.2: AC1.14@76.675,78.675 76.675,79.308 76.792,79.425 79.05,79.425 79.975,80.35 80.025,80.35 80.95,81.275 v1(80.95,81.652) ; v1(81.23,84.775) 81.251,84.796 v1(84.497,84.796)
SWDIO1: IC16.46 STM1.2 | length 18.3
  Top Layer w0.2: STM1.2@90.3,85.05 90.3,80.746 v1(98.573,72.473)
  Bottom Layer w0.2: v1(98.573,72.473) 98.593,72.492 100.843,72.492 IC16.46@100.863,72.512
SWDIO2: IC17.46 STM2.2 | length 15.6
  Top Layer w0.2: STM2.2@35.7,85.15 35.7,83.9 36.275,83.325 v1(38.325,83.325)
  Bottom Layer w0.2: IC17.46@33.588,74.7 35,74.7 38.175,77.875 38.175,83.285 38.285,83.285 v1(38.325,83.325)
TXD0: ESP.36 J8.3 | length 27.1
  Top Layer w0.2: J8.3@57.525,79.23 58.4,78.355 59.62,78.355 60.92,79.655 v1(60.981,79.655)
  Bottom Layer w0.2: v1(60.981,79.655) 61.038,79.712 61.038,80.057 61.437,80.455 61.76,80.455 63.685,82.38 82.346,82.38 v1(82.386,82.339)
pads on no net: AC1.1 AC1.2 AC1.3 AC1.4 AC1.9 AC1.10 AC1.11 CON2.A CON2.B CON5.A CON5.B CON6.A CON6.B CON7.A CON7.B ESP.15 ESP.16 ESP.17 ESP.22 ESP.23 ESP.24 ESP.25 ESP.26 ESP.28 ESP.29 ESP.30 ESP.31 IC8.1 IC8.2 IC14.4 IC15.4 IC16.1 IC16.2 IC16.3 IC16.4 IC16.5 IC16.29 IC16.30 IC16.31 IC16.32 IC16.33 IC16.34 IC16.35 IC16.40 IC16.41 IC16.42 IC16.43 IC16.44 IC16.47 IC16.48 IC16.49 IC16.50 IC16.51 IC16.52 IC16.53 IC16.54 IC16.57 IC16.62 IC16.63 IC16.64 IC17.1 IC17.2 IC17.3 IC17.4 IC17.5 IC17.29 IC17.30 IC17.31 IC17.32 IC17.33 IC17.34 IC17.35 IC17.40 IC17.41 IC17.42 IC17.43 IC17.44 IC17.47 IC17.48 IC17.49 IC17.50 IC17.51 IC17.52 IC17.53 IC17.54 IC17.57 IC17.62 IC17.63 IC17.64 J4.A8 J4.B8 Mot1.7 Mot1.8 Mot2.7 Mot2.8 MOT3.7 MOT3.8 Mot4.7 Mot4.8 S1.3 S1.6 STM1.A STM1.B STM2.A STM2.B

## Polygon pours and split planes (outlines as drawn)
GND on Top Layer "GND_L01_P013" (solid, pour order 13): 1.934,168.484 10.777,169.784 34.582,176.425 50.616,178.633 70.836,178.489 91.138,175.071 106.296,170.466 111.275,167.55 116.225,167.45 116.425,172.2 114.85,174.8 102.425,179.2 89.575,182.475 75.6,184.825 59.975,185.725 51.75,185.575 38.325,184.275 22.475,181.15 9.175,177.1 3.075,174.575 1.451,172.749
GND on Top Layer "GND_L01_P012" (solid, pour order 12): 4.75,147.525 5.925,139.3 16.6,142.65 35.45,148.425 49.092,150.338 62.925,150.65 74.55,149.75 92.75,145.55 103.964,140.959 111.65,139.5 113.2,148.575 103.868,149.53 84.275,155.775 68.05,158 47.95,158.275 34.975,156.025 22.725,152.875 12.075,149.525 4.775,147.75
GND on Top Layer "GND_L01_P008" (solid, pour order 8): 28.25,2.05 29.564,1.471 85.45,0.825 94.372,4.203 99.55,7.025 106.329,10.458 108.328,11.821 110.343,15.955 110.343,60.255 104.775,76.275 104.2,77.775 101.9,88.275 101.325,88.55 14.465,88.55 14.734,85.868 14.465,81.971 14.225,81.05 13.45,78.6 13,77.176 12.1,74.475 11.175,72.3 9.875,68.675 9.125,66.584 7.353,61.643 7.05,58.692 7.176,14.965 11.97,10.025 14.125,8.925 16.475,7.85 18.865,6.506 21.963,4.925 24.012,3.843 26.145,2.79 27.35,2.325
12V on Top Layer "Top Layer-12V" (solid, pour order 6): 70.75,7.4 71.15,7.8 75.775,7.8 75.8,7.825 76.25,7.825 76.525,8.1 76.525,13.175 76.175,13.525 70.925,13.525 68.625,11.225 65.6,11.225 64.75,10.375 51.625,10.375 50.25,9 50.25,8.525 50.05,8.325 49.3,8.325 49.225,8.25 49.225,8.05 49.35,7.925 50,7.925 50.525,7.4
3.3V on Top Layer "3.3V_L01_P001" (solid, pour order 1): 40.85,8.15 31.075,8.15 31.075,9.575 32.05,10.55 36.25,10.55 38.225,12.525 41.075,12.525 41.075,8.375
NetC15_2 on Top Layer "NETC15_2_L01_P000" (solid, pour order 0): 47.05,8.425 46.75,8.125 44.125,8.125 43.825,8.425 43.825,12.075 44.1,12.35 46.8,12.35 47,12.15 47,10.925 47.275,10.65 48.375,10.65 48.55,10.475 48.55,8.475 48.5,8.425
GND on Bottom Layer "GND_L02_P011" (solid, pour order 11): 2.05,168.25 7.675,167.975 11.075,170.463 18.45,172.675 24.679,174.543 39.4,177.275 51.731,178.42 66.407,178.644 80.385,176.664 87.867,175.49 94.7,173.775 103.025,171.275 110.099,168.563 117.099,167.733 116.959,173.967 109.65,176.55 102.825,178.825 93.751,181.374 82.85,183.525 66.481,185.4 48.524,185.4 35.634,183.68 22.784,181.289 15.3,178.825 3.375,174.8 1.925,173.475
GND on Bottom Layer "GND_L02_P010" (solid, pour order 10): 8.762,142.662 8.762,139.925 20.925,144.44 28.425,146.9 40.875,149.525 51.325,151.073 69.466,150.942 80.9,148.75 92.5,145.925 100.4,142.875 110.15,141.675 112.2,144.15 112.2,149.15 104.275,149.15 96.598,151.947 88.905,154.092 80.775,156.075 71.037,157.562 70.575,157.6 70.196,157.701 49.45,157.6 48.95,157.6 48.3,157.6 36.95,155.975 31.775,154.825 23.45,152.7 19.925,151.3 14.05,149.35 8.762,146.712
GND on Bottom Layer "GND_L02_P009" (solid, pour order 9): 35.662,0.437 80.862,0.437 81.6,0.5 85.075,0.9 86.125,1.15 88.475,1.775 89.3,1.95 90.35,2.35 91.5,2.875 92.6,3.4 95.25,4.8 97.6,5.775 100.6,7.55 102.575,8.35 105.462,10.087 107.466,11.258 108.936,12.938 109.975,14.6 110.15,15.3 110.275,61.725 110.027,62.068 109.7,63.375 109.125,64.825 108.375,67 107.55,68.875 106.65,71.425 105.825,73.325 105,75.099 104.425,77.125 103.1,81.325 102.9,82.475 102.825,83 102.55,88.125 102.1,88.575 15.4,88.575 14.718,87.893 14.718,83.268 14.575,83.125 13.9,79.775 13.25,78.125 12.425,75.3 11.625,73.05 10.59,70.425 9.5,67.825 8.7,65.175 7.515,62.29 7.278,15.063 8.325,13.025 8.7,12.65 11.022,10.553 11.9,10.125 13.4,9.375 14.718,8.56 17,7.475 18.899,6.572 21.875,4.925 22.925,4.325 25.075,3.125 26.1,2.75 27.675,2.175 27.853,2.109 28.844,1.854 29.925,1.55 31.7,1.05 33.1,0.8

## Silkscreen, mask and mechanical layers (free items; w line width, h text height)
Top Overlay:
  text "ROBOILO" at 85.55,74.842 h5
  text "ESP_LF_TURBO / Version 0.1" at 85.425,71.75 h2
Mechanical 1:
  drawing of 1325 lines, arcs and shapes, not listed